# EAGLE board CEM-3310-VCADSR-IO (EAGLE 9.6.2)
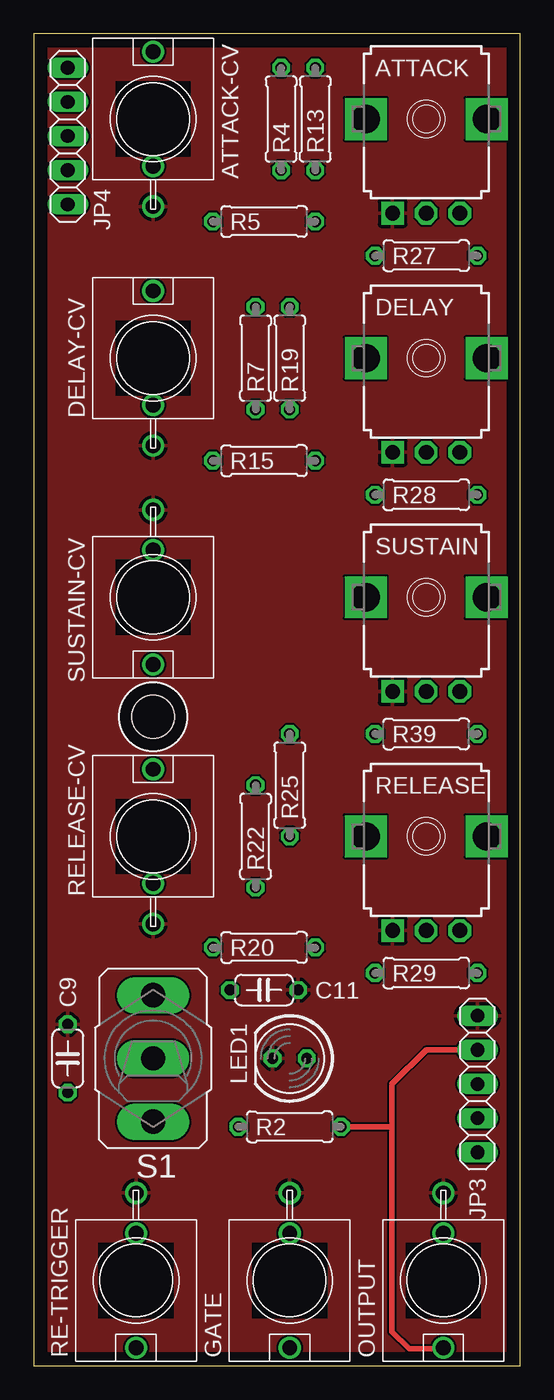
[diagram p0: board, top side]
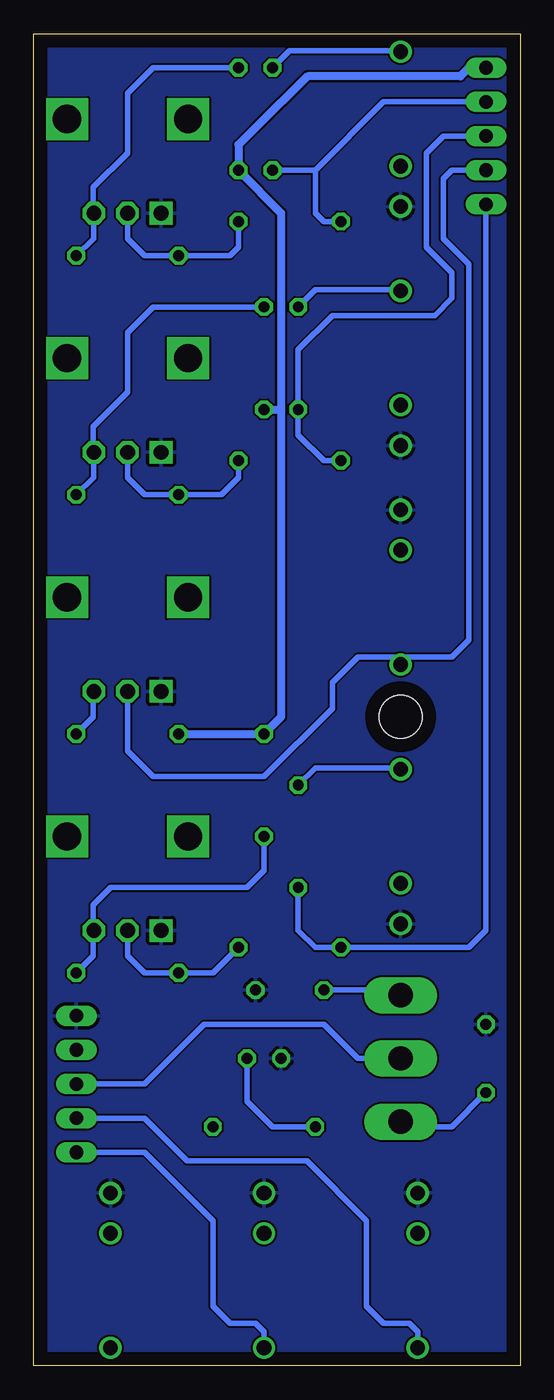
[diagram p1: board, bottom side, seen from below]

Size 36.2 x 99.06 mm. Coordinates in mm from the lower left corner, seen from the top.
Outline: 0,0 36.2,0 36.2,99.06 0,99.05 0,0
Copper layers (1*16): Top 0.035mm / dielectric 1.5mm / Bottom 0.035mm
Design rules "default": minimum track width 6mil, minimum drill 0.35mm, track to track 6mil, track to pad 6mil, pad to pad 6mil, via to via 6mil, smd to smd 6mil, copper to edge 40mil, drill to drill 6mil, minimum pad ring 10mil, minimum via ring 8mil, stop-mask expansion 4mil, vias tented up to drill 0mil, thermal gap 10mil
Holes 3.2 mm at 8.89,48.26

## Footprints (pad centres in the part's own frame; a part is rotated, then mirrored left to right if it is on the bottom)
EVUF = drill 1.1 pad 1.676 square: 1 -2.5,-7 | drill 1.1 pad 1.676 octagon: 2 0,-7; 3 2.5,-7 | drill 2.1 pad 2.8 square: M1 4.5,0; M2 -4.5,0
WQP-PJ301M-12_JACK = drill 1.1: P$1 0,5; P$2 0,-3.5; P$3 0,-6.5
C050-024X044 = drill 0.813 octagon: 1 -2.54,0; 2 2.54,0
1X05 = drill 1.016 long: 1 -5.08,0; 2 -2.54,0; 3 0,0; 4 2.54,0; 5 5.08,0
LED5MM = drill 0.813 octagon: A -1.27,0; K 1.27,0
0207/7 = drill 0.813 octagon: 1 -3.81,0; 2 3.81,0
M9040P = drill 1.803 long: 1 0,4.699; 2 0,0; 3 0,-4.699

## Placement (x,y rotation side)
ATTACK  10k  [EVUF]  29.21,92.71 0 top
ATTACK-CV  WQP-PJ301M-12_JACK  [WQP-PJ301M-12_JACK]  8.89,92.71 0 top
C9  .0047uF  [C050-024X044]  2.54,22.86 270 top
C11  .015uF  [C050-024X044]  17.14,27.94 180 top
DELAY  10k  [EVUF]  29.21,74.93 0 top
DELAY-CV  WQP-PJ301M-12_JACK  [WQP-PJ301M-12_JACK]  8.89,74.93 0 top
GATE  WQP-PJ301M-12_JACK  [WQP-PJ301M-12_JACK]  19.05,6.35 180 top
JP3  [1X05]  33.02,20.95 270 top
JP4  [1X05]  2.54,91.44 90 top
LED1  [LED5MM]  19.05,22.86 180 top
OUTPUT  WQP-PJ301M-12_JACK  [WQP-PJ301M-12_JACK]  30.48,6.35 180 top
R2  3.3k  [0207/7]  19.05,17.78 180 top
R4  10k  [0207/7]  18.41,92.71 90 top
R5  10k  [0207/7]  17.14,85.09 0 top
R7  10k  [0207/7]  16.51,74.93 270 top
R13  12k  [0207/7]  20.95,92.71 90 top
R15  10k  [0207/7]  17.14,67.31 0 top
R19  12k  [0207/7]  19.05,74.93 90 top
R20  10k  [0207/7]  17.14,31.11 0 top
R22  10k  [0207/7]  16.51,39.37 270 top
R25  12k  [0207/7]  19.05,43.18 270 top
R27  10k  [0207/7]  29.21,82.55 180 top
R28  10k  [0207/7]  29.21,64.77 180 top
R29  10k  [0207/7]  29.21,29.21 180 top
R39  12k  [0207/7]  29.21,46.99 0 top
RE-TRIGGER  WQP-PJ301M-12_JACK  [WQP-PJ301M-12_JACK]  7.62,6.35 180 top
RELEASE  10k  [EVUF]  29.21,39.37 0 top
RELEASE-CV  WQP-PJ301M-12_JACK  [WQP-PJ301M-12_JACK]  8.89,39.37 0 top
S1  [M9040P]  8.89,22.86 0 top
SUSTAIN  10k  [EVUF]  29.21,57.15 0 top
SUSTAIN-CV  WQP-PJ301M-12_JACK  [WQP-PJ301M-12_JACK]  8.89,57.15 180 top

## Library data of the parts
ATTACK DELAY RELEASE SUSTAIN = TomW
ATTACK-CV DELAY-CV GATE OUTPUT RE-TRIGGER RELEASE-CV SUSTAIN-CV = thonkiconn
C9 C11 R2 R4 R5 R7 R13 R15 R19 R20 R22 R25 R27-R29 R39 = resistor
JP3 JP4 = pinhead
LED1 = led
S1 = switch

## Nets
+12V: JP4.5 R13.1 R19.1 R25.1 R39.1
ATK-IO: JP4.4 R4.1 R5.1
ATTACK-CV: ATTACK-CV.P$1 R4.2
DELAY-VC: DELAY-CV.P$1 R7.1
DLY-IO: JP4.3 R7.2 R15.1
GATE-IO: GATE.P$1 JP3.5
GND: ATTACK-CV.P$3 ATTACK.1 C9.1 C11.1 DELAY-CV.P$3 DELAY.1 GATE.P$3 JP3.1 LED1.K OUTPUT.P$3 RE-TRIGGER.P$3 RELEASE-CV.P$3 RELEASE.1 SUSTAIN-CV.P$3 SUSTAIN.1
N$2: C9.2 S1.3
N$3: C11.2 S1.1
N$7: ATTACK.2 R5.2 R27.2
N$8: ATTACK.3 R13.2 R27.1
N$10: DELAY.3 R19.2 R28.1
N$11: DELAY.2 R15.2 R28.2
N$13: R20.2 R29.2 RELEASE.2
N$14: R25.2 R29.1 RELEASE.3
N$25: LED1.A R2.2
N$32: R39.2 SUSTAIN.3
OUTPUT-IO: JP3.2 OUTPUT.P$1 R2.1
RANGE-IO: JP3.3 S1.2
RE-TRIGGER-IO: JP3.4 RE-TRIGGER.P$1
RELEASE-CV: R22.1 RELEASE-CV.P$1
RLS-IO: JP4.1 R20.1 R22.2
STN-IO: JP4.2 SUSTAIN-CV.P$1 SUSTAIN.2

## Tracks (layer width: path | path; a pad name or v marks a point on that pad's centre or on a via)
+12V
  Bottom 0.61: JP4.5 3.81,96.52 4.45,95.89 15.8,95.89 19.68,92.08 20.95,90.81 R13.1 17.78,85.72 17.78,71.12 | R19.1 17.78,71.12 | R39.1 R25.1 17.78,48.26 17.78,71.12
ATK-IO
  Bottom 0.406: 15.24,88.9 15.24,85.72 14.61,85.09 R5.1 | JP4.4 10.16,93.98 15.24,88.9 | 15.24,88.9 R4.1
ATTACK-CV
  Bottom 0.406: ATTACK-CV.P$1 8.97,97.79 17.14,97.79 R4.2
DELAY-VC
  Bottom 0.406: DELAY-CV.P$1 8.89,80.01 15.24,80.01 R7.1
DLY-IO
  Bottom 0.406: R15.1 14.61,67.31 16.51,69.22 R7.2 16.51,75.56 13.97,78.11 6.35,78.11 5.08,79.38 5.08,81.28 6.99,83.19 6.99,90.17 5.71,91.44 JP4.3
GATE-IO
  Bottom 0.406: JP3.5 27.94,15.88 22.86,10.79 22.86,4.45 21.59,3.17 19.68,3.17 19.05,2.54 GATE.P$1
GND
  pour Top: 0,99.06 0,0 36.2,0 36.2,99.06
  pour Bottom: 0,99.06 0,0 36.2,0 36.2,99.06
N$2
  Bottom 0.406: C9.2 5.08,17.78 8.89,17.78 S1.3
N$3
  Bottom 0.406: C11.2 8.89,27.94 S1.1
N$7
  Bottom 0.406: ATTACK.2 29.21,83.82 27.94,82.55 R27.2 21.59,82.55 20.95,83.19 R5.2
N$8
  Bottom 0.406: R27.1 31.71,83.82 ATTACK.3 31.75,86.98 31.75,87.63 29.21,90.17 29.21,94.61 27.3,96.52 R13.2
N$10
  Bottom 0.406: R28.1 31.71,66.04 DELAY.3 31.75,69.2 31.75,69.85 29.21,72.39 29.21,76.83 27.3,78.74 R19.2
N$11
  Bottom 0.406: R15.2 20.95,66.04 22.23,64.77 R28.2 27.94,64.77 29.21,66.04 DELAY.2
N$13
  Bottom 0.406: RELEASE.2 29.21,30.48 27.94,29.21 R29.2 22.86,29.21 R20.2
N$14
  Bottom 0.406: RELEASE.3 31.75,32.37 | 31.75,32.37 31.75,30.48 R29.1 | R25.2 19.05,36.83 20.32,35.56 30.48,35.56 31.75,34.29 31.75,32.37
N$25
  Bottom 0.406: LED1.A 20.32,19.68 18.41,17.78 R2.2
N$32
  Bottom 0.406: SUSTAIN.3 31.75,49.52 31.75,48.26 R39.2
OUTPUT-IO
  Top 0.406: 26.67,17.78 26.67,20.95 29.21,23.5 JP3.2 | R2.1 26.67,17.78 | 26.67,17.78 26.67,2.54 27.94,1.27 30.48,1.27 OUTPUT.P$1
RANGE-IO
  Bottom 0.406: JP3.3 27.94,20.95 23.5,25.4 14.61,25.4 12.06,22.86 S1.2
RE-TRIGGER-IO
  Bottom 0.406: JP3.4 27.94,18.41 24.77,15.24 15.88,15.24 11.43,10.79 11.43,4.45 10.16,3.17 8.26,3.17 7.62,2.54 RE-TRIGGER.P$1
RELEASE-CV
  Bottom 0.406: RELEASE-CV.P$1 8.89,44.45 15.24,44.45 R22.1
RLS-IO
  Bottom 0.406: R22.2 16.51,32.38 15.24,31.11 R20.1 3.81,31.11 2.54,32.38 JP4.1
STN-IO
  Top 0.406: SUSTAIN-CV.P$1 8.89,52.7
  Bottom 0.406: SUSTAIN.2 29.21,45.72 27.3,43.81 19.05,43.81 13.97,48.9 13.97,50.8 12.06,52.7 8.89,52.7 | JP4.2 5.08,88.9 5.71,88.27 5.71,83.82 3.81,81.92 3.81,53.98 5.08,52.7 8.89,52.7 | 8.89,52.7 SUSTAIN-CV.P$1